# EAGLE board TRV_ANAREN_V0.2 (EAGLE 6.3)
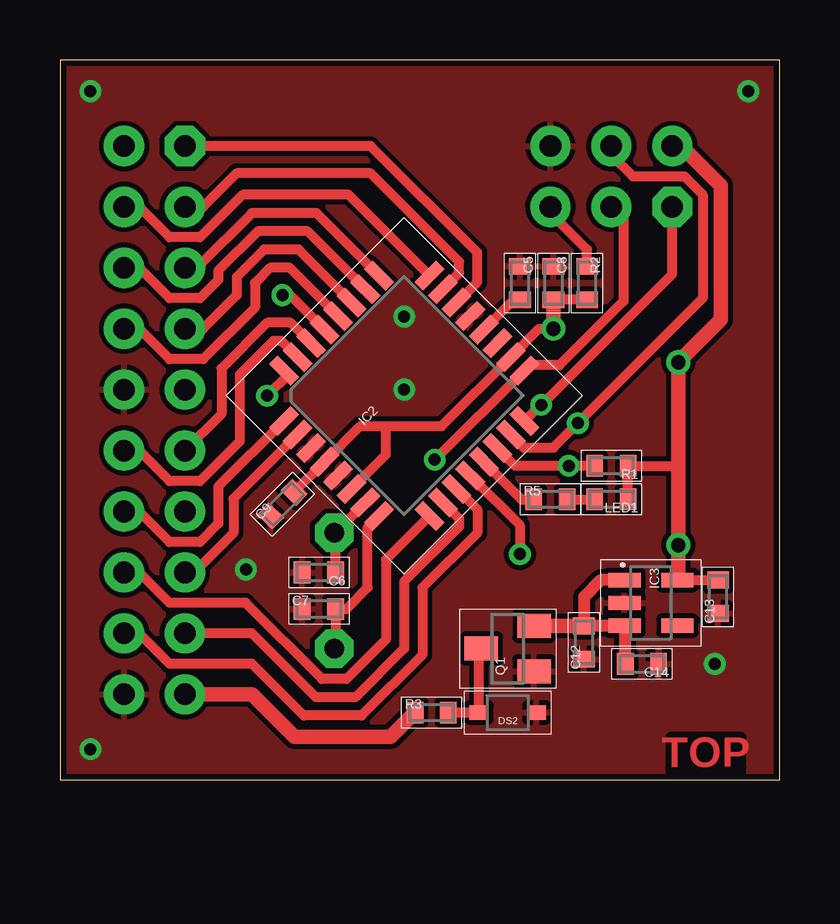
[diagram p0: board, top side]
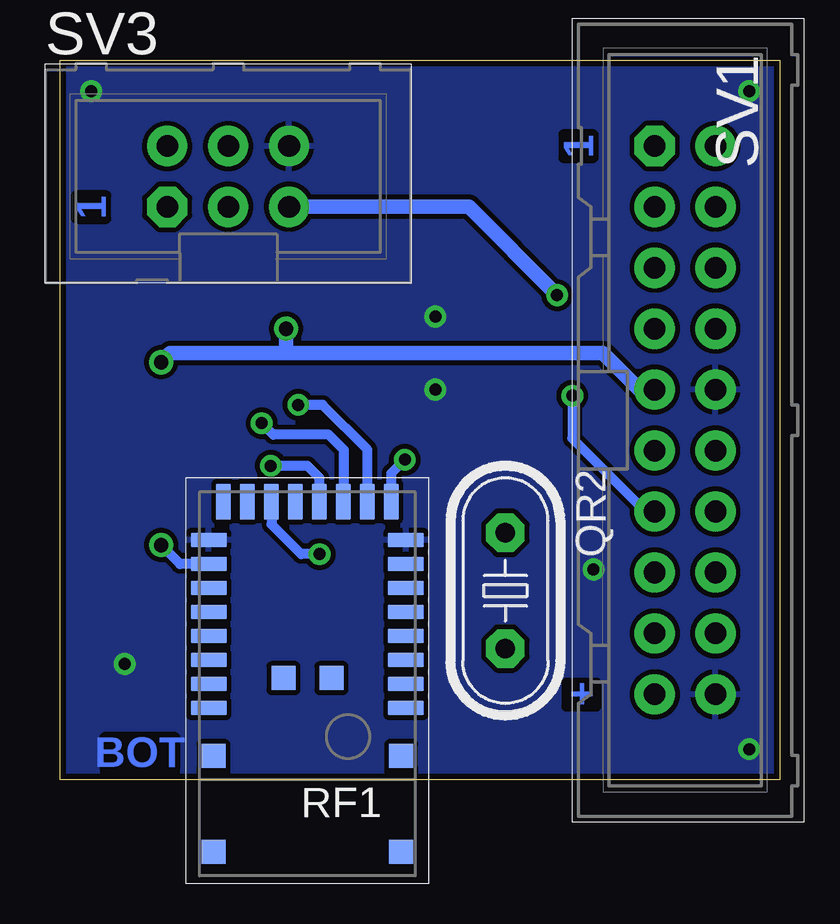
[diagram p1: board, bottom side, seen from below]

Size 30 x 30 mm. Coordinates in mm from the lower left corner, seen from the top.
Outline: 0,0 30,0 30,30 0,30 0,0
Copper layers (1*16): Top 0.035mm / dielectric 1.5mm / Bottom 0.035mm
Design rules "default": minimum track width 8mil, minimum drill 0.3mm, track to track 8mil, track to pad 8mil, pad to pad 8mil, via to via 8mil, smd to smd 8mil, copper to edge 10mil, drill to drill 8mil, minimum pad ring 5mil, minimum via ring 8mil, stop-mask expansion 4mil, vias tented up to drill 25mil, thermal gap 8mil

## Footprints (pad centres in the part's own frame; a part is rotated, then mirrored left to right if it is on the bottom)
0603 = smd 0.7 x 0.9: 1 -0.697,0; 2 0.697,0
SOD323 = smd 0.8 x 0.6: A 1.2,0; C -1.2,0
TQFP32-08 = smd 1.27 x 0.5: 1 -4.293,2.8; 2 -4.293,2; 3 -4.293,1.2; 4 -4.293,0.4; 5 -4.293,-0.4; 6 -4.293,-1.2; 7 -4.293,-2; 8 -4.293,-2.8; 17 4.293,-2.8; 18 4.293,-2; 19 4.293,-1.2; 20 4.293,-0.4; 21 4.293,0.4; 22 4.293,1.2; 23 4.293,2; 24 4.293,2.8 | smd 0.5 x 1.27: 9 -2.8,-4.293; 10 -2,-4.293; 11 -1.2,-4.293; 12 -0.4,-4.293; 13 0.4,-4.293; 14 1.2,-4.293; 15 2,-4.293; 16 2.8,-4.293; 25 2.8,4.293; 26 2,4.293; 27 1.2,4.293; 28 0.4,4.293; 29 -0.4,4.293; 30 -1.2,4.293; 31 -2,4.293; 32 -2.8,4.293
SOT23-5 = smd 0.6 x 1.35: 1 -0.95,-1.101; 2 0,-1.101; 3 0.95,-1.101; 4 0.95,1.101; 5 -0.951,1.101
SOT23 = smd 1 x 1.4: 1 -0.95,-1.1; 2 0.95,-1.1; 3 0,1.1
HC49U-V = drill 0.813 pad 1.6 octagon: 1 -2.413,0; 2 2.413,0
ANAREN = smd 1.5 x 0.61: 1 -4.11,2.6; 2 -4.11,1.6; 3 -4.11,0.6; 4 -4.11,-0.4; 5 -4.11,-1.4; 6 -4.11,-2.4; 7 -4.11,-3.4; 8 -4.11,-4.4; 17 4.11,-4.4; 18 4.11,-3.4; 19 4.11,-2.4; 20 4.11,-1.4; 21 4.11,-0.4; 22 4.11,0.6; 23 4.11,1.6; 24 4.11,2.6 | smd 0.61 x 1.5: 9 -3.5,-6; 10 -2.5,-6; 11 -1.5,-6; 12 -0.5,-6; 13 0.5,-6; 14 1.5,-6; 15 2.5,-6; 16 3.5,-6 | smd 1 x 1: PL0 -3.91,8.6; PL1 3.91,8.6; PL2 -3.91,4.6; PL3 3.91,4.6; PL4 -1,1.35; PL5 1,1.35
ML20 = drill 0.9 pad 1.676 octagon: 1 -11.43,-1.27 | drill 0.9 pad 1.676: 2 -11.43,1.27; 3 -8.89,-1.27; 4 -8.89,1.27; 5 -6.35,-1.27; 6 -6.35,1.27; 7 -3.81,-1.27; 8 -3.81,1.27; 9 -1.27,-1.27; 10 -1.27,1.27; 11 1.27,-1.27; 12 1.27,1.27; 13 3.81,-1.27; 14 3.81,1.27; 15 6.35,-1.27; 16 6.35,1.27; 17 8.89,-1.27; 18 8.89,1.27; 19 11.43,-1.27; 20 11.43,1.27
ML6 = drill 0.9 pad 1.676 octagon: 1 -2.54,-1.27 | drill 0.9 pad 1.676: 2 -2.54,1.27; 3 0,-1.27; 4 0,1.27; 5 2.54,-1.27; 6 2.54,1.27

## Placement (x,y rotation side)
C5  100n  [0603]  19.18,20.7 270 top
C6  22p  [0603]  10.79,8.64 180 top
C7  22p  [0603]  10.79,7.11 0 top
C8  100n  [0603]  20.57,20.7 270 top
C9  100n  [0603]  9.27,11.48 45 top
C12  1u  [0603]  21.84,5.71 90 top
C13  1u  [0603]  27.43,7.62 90 top
C14  100n  [0603]  24.27,4.82 180 top
DS2  PESD12VL1BA  [SOD323]  18.67,2.79 180 top
IC2  MEGA168PA-AU  [TQFP32-08]  14.35,16 45 top
IC3  LP2992-IM5-3.3  [SOT23-5]  24.64,7.37 270 top
LED1  LEDR  [0603]  22.99,11.68 180 top
Q1  IRLM9301  [SOT23]  18.67,5.46 90 top
QR2  16.000  [HC49U-V]  11.43,7.87 270 bottom
R1  10k  [0603]  22.99,13.08 180 top
R2  10k  [0603]  21.97,20.7 270 top
R3  0R  [0603]  15.49,2.79 0 top
R5  330R  [0603]  20.45,11.68 0 top
RF1  [ANAREN]  19.68,5.59 180 bottom
SV1  ISP  [ML20]  3.94,14.99 270 bottom
SV3  ISP  [ML6]  22.99,25.15 0 bottom

## Library data of the parts
C5-C9 C12-C14 R1-R3 R5 = RCL
DS2 = Diode
IC2 = atmel
IC3 = DCDC
LED1 = Optic
Q1 = Transistor
QR2 = QUARTZ
RF1 = RF
SV1 SV3 = Conn

## Nets
+3V3: C8.2 C9.2 C13.2 IC2.4 IC2.6 IC2.18 IC3.5 LED1.1 R1.1 R2.2 RF1.18 SV1.9 SV3.2
GND: C5.1 C6.2 C7.1 C8.1 C9.1 C12.1 C13.1 C14.1 DS2.C IC2.3 IC2.5 IC2.21 IC3.2 Q1.1 RF1.8 RF1.17 SV1.10 SV1.20 SV3.6
LED: IC2.13 R5.1
MISO: IC2.16 RF1.10 SV3.1
MOSI: IC2.15 RF1.11 SV3.4
N$3: IC2.22 SV1.1
N$5: DS2.A Q1.3 R3.2
N$6: C5.2 IC2.20
N$12: C12.2 C14.2 IC3.1 IC3.3 Q1.2
N$18: C6.1 IC2.7 QR2.1
N$19: C7.2 IC2.8 QR2.2
N$21: LED1.2 R5.2
N$23: R3.1 SV1.19
PC0: IC2.23 SV1.3
PC1: IC2.24 SV1.4
PC2: IC2.25 SV1.5
PC3: IC2.26 SV1.6
PC4: IC2.27 SV1.7
PC5: IC2.28 SV1.8
PD2: IC2.32 SV1.13
PD3: IC2.1 SV1.14
PD4: IC2.2 SV1.15
PD5: IC2.9 SV1.16
PD6: IC2.10 SV1.17
PD7: IC2.11 SV1.18
RIRQ: IC2.12 RF1.14
RSEL: IC2.14 R1.2 RF1.12
RST: IC2.29 R2.1 SV3.5
RXD: IC2.30 SV1.11
SCK: IC2.17 RF1.9 SV3.3
TXD: IC2.31 SV1.12

## Tracks (layer width: path | path; a pad name or v marks a point on that pad's centre or on a via)
+3V3  (via drill 0.6)
  Top 0.406: C9.2 IC2.4 12.52,14.73 13.59,14.73 | v20.57,18.8 19.97,18.8 IC2.18 15.91,14.73 13.59,14.73 | R2.2 C8.2 | C13.2 IC3.5 25.78,8.36 | IC2.6 13.59,13.54 13.59,14.73 | R1.1 23.75,13.08 | 23.75,13.08 25.78,13.08 | LED1.1 23.68,13.02 23.75,13.08
  Top 0.61: 25.78,8.36 v25.78,9.78 25.78,13.08 v25.78,17.4 27.56,19.18 27.56,24.77 25.91,26.42 SV3.2 | C8.2 v20.57,18.8
  Bottom 0.406: RF1.18 24.99,8.99 v25.78,9.78
  Bottom 0.61: 20.57,17.78 7.37,17.78 5.84,16.26 SV1.9 | v20.57,18.8 20.57,17.78 | 20.57,17.78 25.4,17.78 v25.78,17.4
GND  (via drill 0.5)
  other vias: 7.75,8.76 1.27,28.7 1.27,1.27 28.7,28.7 27.3,4.83 14.35,16.26 14.35,19.3
  pour Top: 0,0 30,0 30,30 0,30
  pour Bottom: 0,0 30,0 30,30 0,30
LED
  Top 0.406: IC2.13 19.23,11.68 R5.1
MISO  (via drill 0.5)
  Top 0.406: IC2.16 20.04,15.62 v20.07,15.62 25.53,21.08 SV3.1
  Bottom 0.406: RF1.10 17.18,13.76 19.05,15.62 v20.07,15.62
MOSI  (via drill 0.5)
  Top 0.406: IC2.15 19.34,13.84 20.57,13.84 v21.59,14.86 26.8,20.07 26.8,24.38 26.04,25.15 23.88,25.15 22.99,26.04 SV3.4
  Bottom 0.203: 18.16,11.68 RF1.11
  Bottom 0.406: 18.16,11.68 18.16,13.74 IC2.15 21.11,14.38 v21.59,14.86
N$3
  Top 0.406: IC2.22 17.4,20.75 17.4,21.97 12.95,26.42 SV1.1
N$5
  Top 0.406: R3.2 DS2.A 17.47,5.36 Q1.3
N$6
  Top 0.406: IC2.20 18.92,20 C5.2
N$12
  Top 0.406: IC3.1 23.94,8.32
  Top 0.508: C14.2 23.57,6.38 IC3.3 C12.2 21.84,7.62 22.54,8.32 IC3.1
  Top 0.61: C12.2 Q1.2
N$18
  Top 0.406: IC2.7 11.46,10.29 QR2.1 11.49,10.22 C6.1
N$19
  Top 0.406: IC2.8 12.83,10.52 12.83,8 11.94,7.11 C7.2 11.49,5.52 QR2.2
N$21
  Top 0.406: R5.2 LED1.2
N$23
  Top 0.61: SV1.19 8,3.56 9.78,1.78 13.78,1.78 R3.1
PC0
  Top 0.406: IC2.23 16.64,21.12 16.64,21.59 12.95,25.27 7.37,25.27 5.97,23.88 SV1.3
PC1
  Top 0.406: IC2.24 12.04,24.38 7.62,24.38 5.84,22.61 4.57,22.61 3.3,23.88 SV1.4
PC2
  Top 0.406: SV1.5 5.71,21.34 8,23.62 10.69,23.62 IC2.25
PC3
  Top 0.406: SV1.6 3.3,21.34 4.57,20.07 5.84,20.07 6.6,20.83 6.6,21.21 8.26,22.86 10.32,22.86 IC2.26
PC4
  Top 0.406: SV1.7 5.97,18.8 7.37,20.19 7.37,20.95 8.51,22.1 9.95,22.1 IC2.27
PC5
  Top 0.406: SV1.8 3.3,18.8 4.57,17.53 5.97,17.53 8.13,19.68 8.13,20.7 8.76,21.34 9.58,21.34 IC2.28
PD2  (via drill 0.5)
  Top 0.406: IC2.32 9.36,17.06 9.53,16.89 v8.64,16
  Bottom 0.406: v8.64,16 8.64,14.22 5.59,11.18 SV1.13
PD3
  Top 0.406: IC2.1 6.6,12.21 6.6,10.67 5.84,9.91 4.57,9.91 3.3,11.18 SV1.14
PD4
  Top 0.406: IC2.2 7.24,11.72 7.24,10.29 5.59,8.64 SV1.15
PD5
  Top 0.406: IC2.9 13.59,9.17 13.59,5.84 11.94,4.19 10.92,4.19 7.75,7.37 4.57,7.37 3.3,8.64 SV1.16
PD6
  Top 0.406: IC2.10 16.64,10.89 16.64,10.54 14.35,8.26 14.35,5.46 12.32,3.43 10.67,3.43 8,6.1 SV1.17
PD7
  Top 0.406: IC2.11 17.4,11.26 17.4,10.29 15.11,8 15.11,5.21 12.57,2.67 10.16,2.67 8,4.83 4.57,4.83 3.3,6.1 SV1.18
RIRQ  (via drill 0.5)
  Top 0.406: IC2.12 19.18,10.61 v19.18,9.4
  Bottom 0.406: v19.18,9.4 19.94,9.4 21.18,10.64 RF1.14
RSEL  (via drill 0.5)
  Top 0.406: IC2.14 18.97,13.08 v21.21,13.08 R1.2
  Bottom 0.406: RF1.12 19.18,12.58 19.68,13.08 v21.21,13.08
RST  (via drill 0.5)
  Top 0.406: IC2.29 9.59,20.19 v9.27,20.19 | R2.1 21.97,22.1 20.45,23.62 SV3.5
  Bottom 0.61: SV3.5 12.95,23.88 v9.27,20.19
RXD
  Top 0.406: IC2.30 9.61,19.05 8.64,19.05 6.73,17.14 6.73,15.24 SV1.11
SCK  (via drill 0.5)
  Top 0.406: v15.62,13.34 15.64,13.34 IC2.17 19.58,17.27 20.83,17.27 23.5,19.94 23.5,23.37 SV3.3
  Bottom 0.406: RF1.9 16.18,12.77 v15.62,13.34
TXD
  Top 0.406: IC2.31 9.24,18.29 8.89,18.29 7.49,16.89 7.49,14.1 5.84,12.45 4.57,12.45 3.3,13.72 SV1.12

## Text on the board
Top: TOP
Bottom: 1 | 1 | + | BOT